# Altium PCB Summits7Beta_PCB1.PcbDoc
Units mm, origin at the board's own origin, x right, y up, seen from the top; angles counter-clockwise.
Board outline 62.5 x 25 mm, 2 copper layers (Top Layer, Bottom Layer); 52 components, 37 nets, 173 pads, 50 vias.
Unrouted connection lines stored in the file: 108.
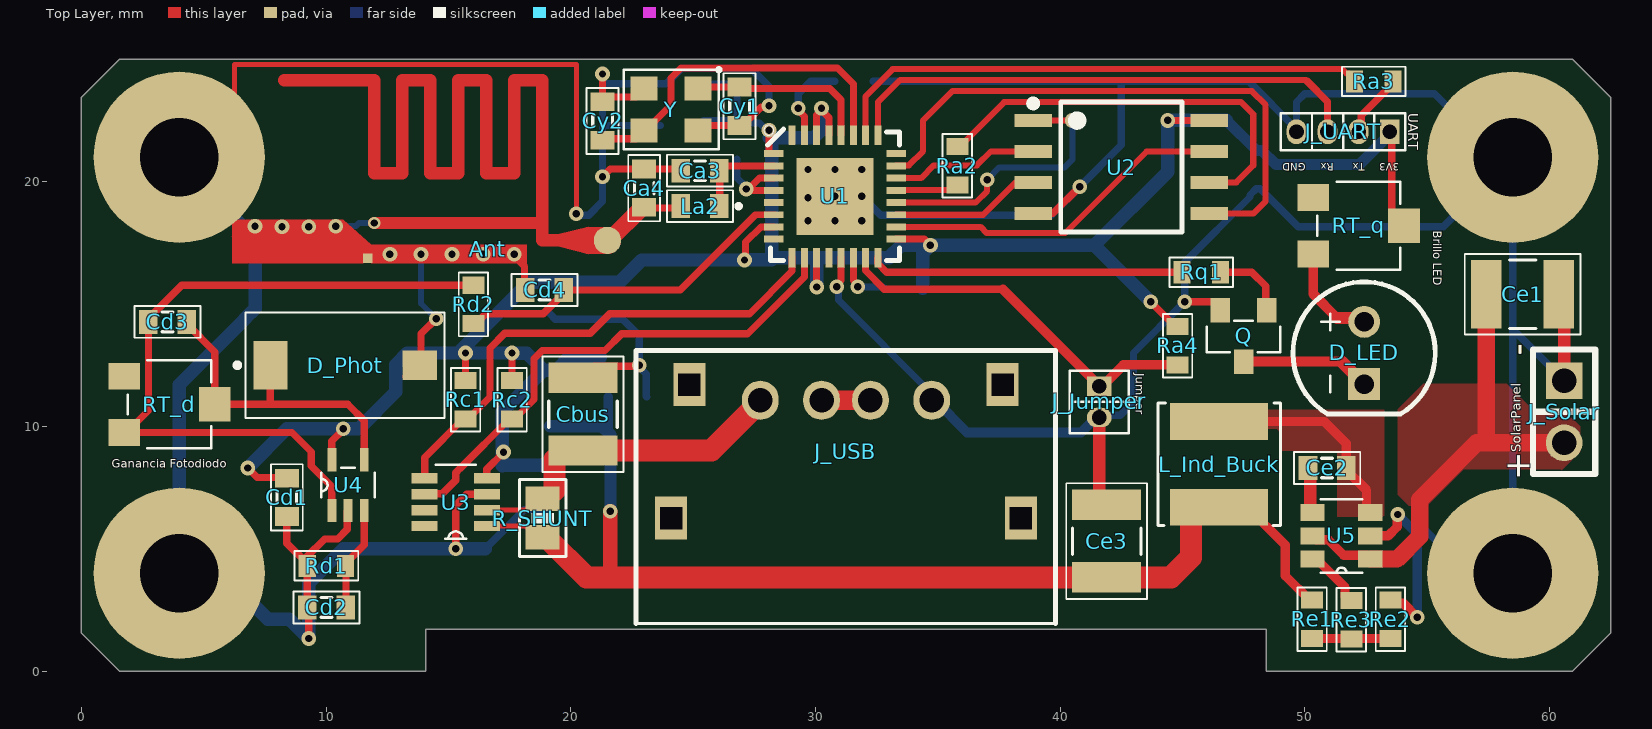
[diagram p0: Top Layer view]
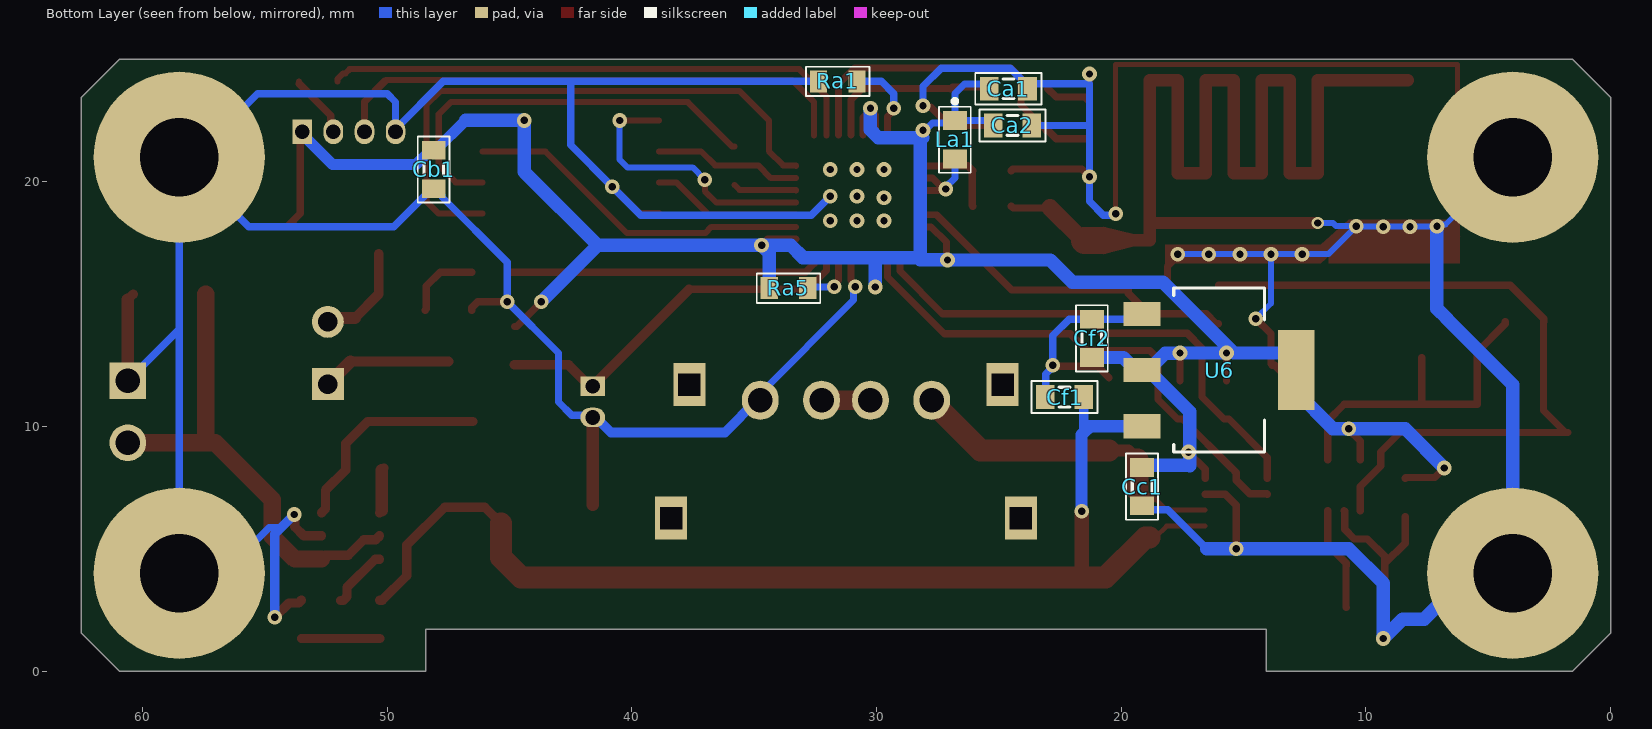
[diagram p1: Bottom Layer view, seen from below]

## Layer stack, top to bottom
Top Solder: solder mask 0.0102, Solder Resist, Dk 3.5
Top Layer: signal copper 0.0356
Dielectric 1: dielectric 0.32, FR-4, Dk 4.8
Bottom Layer: signal copper 0.0356
Bottom Solder: solder mask 0.0102, Solder Resist, Dk 3.5

## Board outline
62.5,1.55 60.95,0 48.425,0 48.425,1.7 14.075,1.7 14.075,0 1.55,0 0,1.55 0,23.45 1.55,25 60.95,25 62.5,23.45

## Design rules (kind name [scope] priority, off if disabled: settings)
Clearance [All] p1: gap=0.2 ignorepadtopadclearanceinfootprint=FALSE
ComponentClearance [All] p1: gap=0.099 collisioncheckmode=3 verticalgap=0.099 showdistances=FALSE
HoleSize [All] p1: absolutevalues=TRUE maxlimit=3.2 minlimit=0.025 maxpercent=80.000 minpercent=20.000
MinimumSolderMaskSliver [All] p1: minsoldermaskwidth=0.045
PlaneConnect [All] p1: planeconnectstyle=Direct reliefexpansion=0.508 reliefentries=4 reliefconductorwidth=0.254 reliefairgap=0.254
PolygonConnect [All] p1: connectstyle=Direct reliefconductorwidth=0.254 reliefentries=4 polygonreliefangle="90 Angle" airgapwidth=0.254
RoutingVias [All] p1: holewidth=0.3 width=0.6 viastyle="Through Hole" minholewidth=0.008 minwidth=0.5 maxholewidth=4 maxwidth=7.1
SilkToSilkClearance [All] p1: silktosilkclearance=0
SilkToSolderMaskClearance [IsPad] p1: minsilkscreentomaskgap=0.099 clearancetoexposedcopper=TRUE
SolderMaskExpansion [All] p1: expansion=0.102
Width [All] p1: maxlimit=1.2 minlimit=0.2 preferedwidth=0.2
24 further rules are at their usual default settings.

## Components (designator, comment, footprint, x,y, rotation, side; value= is the part's Value field where it differs from the comment)
Ant "Antena" ANTENA2 18.198,4.468 r0 top
Ca1 "10uF" CAP_0603 24.615,23.8 r180 bottom
Ca2 "100nF" CAP_0603 24.45,22.3 r180 bottom
Ca3 "3.0pF" CAP_0603 25.285,20.45 r180 top
Ca4 "2.4pF" CAP_0603 23,19.735 r90 top
Cb1 "4.7uF" CAP_0603 48.1,20.5 r270 bottom
Cbus "22uF" CAP_1210 20.5,10.5 r90 top
Cc1 "4.7uF" CAP_0603 19.15,7.535 r270 bottom
Cd1 "4.7uF" CAP_0603 8.4,7.1 r270 top
Cd2 "100pF" CAP_0603 10.015,2.6 r180 top
Cd3 "100pF" CAP_0603 3.515,14.27 r180 top
Cd4 "2.2uF" CAP_0603 18.93,15.575 r180 top
Ce1 "22uF" CAP_1210 58.9,15.4 r0 top
Ce2 "1uF" CAP_0603 50.915,8.3 r0 top
Ce3 "22uF" CAP_1210 41.9,5.315 r90 top
Cf1 "22uF" CAP_0603 22.315,11.2 r0 bottom
Cf2 "22uF" CAP_0603 21.2,13.6 r90 bottom
Cy1 "100nF" CAP_0603 26.9,23.085 r270 top
Cy2 "100nF" CAP_0603 21.3,22.485 r90 top
D_LED "OVLGC0C6B9" LED 52.425,13 r90 top locked
D_Phot "VBPW34S" BPW34S 10.775,12.5 r180 top locked
J_Jumper "Jumper" "JUMPER-1.27 mm" 41.6,11 r270 top
J_Solar "Connx2_Panel" PANEL_IN 60.6,10.6 r90 top
J_UART "Connx4_UART" UART-1.27MM 51.565,22.043 r180 top
J_USB "USB-A 5V" USB-A_IPX8 27.75,11.07 r0 top
L_Ind_Buck "6.8uH 2.3A" Inductor_SRN5040 46.5,8.45 r90 top
La1 "2.2nH" IND_0603 26.825,21.69 r270 bottom
La2 "2.2nH" IND_0603 25.26,19.025 r180 top
Q "ZXT11N20DF" Transistor_SOT23-3 47.5,13.7 r180 top
R_SHUNT "0.01 Ohm 0.5W 1%" RES-SHUNT-0805 18.85,6.25 r90 top
Ra1 "12k +- 1%" RES_0603 31.585,24.1 r0 bottom
Ra2 "220" RES_0603 35.8,20.65 r270 top
Ra3 "500" RES_0603 52.815,24.1 r180 top
Ra4 "1k" RES_0603 44.8,13.3 r270 top
Ra5 "5k" RES_0603 33.6,15.65 r180 bottom
Rc1 "10k" RES_0603 15.7,11.085 r270 top
Rc2 "10k" RES_0603 17.6,11.085 r270 top
Rd1 "1k" RES_0603 10.015,4.3 r0 top
Rd2 "6.8k" RES_0603 16.025,14.985 r90 top
Re1 "40.2k" RES_0603 50.3,2.115 r270 top
Re2 "7.68k" RES_0603 53.5,2.115 r90 top
Re3 "59k" RES_0603 51.9,2.1 r270 top
Rq1 "1k" RES_0603 45.765,16.3 r180 top
RT_d "R_Trimmer_20k" RES_TRIMMER 3.6,10.9 r270 top
RT_q "R_Trimmer_100" RES_TRIMMER 52.2,18.2 r270 top
U1 "ESP8266EX" ESP8266_QFN32-5X5MM 30.8,19.4 r0 top
U2 "W25Q32JVSSIQ" W25Q32JVSSIQ_SOIC127P790X216-8N 42.5,20.6 r0 top
U3 "INA219BIDCNR" "INA219B SOT23" 15.3,6.9 r180 top
U4 "MCP6001T-E/LT" MCP6001-SC70-5 10.9,7.6 r90 top
U5 "AP65111AWU-7" AP65111A-SOT23-6 51.5,5.525 r180 top
U6 "LT1117IST-3.3" LT1117IST-3.3_SOT-223 16,12.3 r180 bottom
Y "ABM8-26MHz" ABM8-26_OSCSC320X250X100N 24.1,22.95 r270 top

## Footprints (in the part's own frame and the unit in brackets; to place one, negate y for a bottom-side part, rotate by r counter-clockwise, add the part's x,y. Pads: shape width x height; smd on the part's side, far side on the other; paste and mask are expansions set on the pad)
ABM8-26_OSCSC320X250X100N [mm] "Crystal de 26MHz"
  rect 0.98x1.1 smd: 1(-0.85,1.1) 2(-0.85,-1.1) 3(0.85,-1.1) 4(0.85,1.1)
  silkscreen extent -1.71,-1.93 1.63,2.04, body extent -1.25,-1.6 1.25,1.6, height 2.63
ANTENA2 [mil] "Footprint Antena2"
  round 44 smd: 1(130,517)
  rect 15x15 smd: 2(-255.91,488.19)
  Top Layer region: -262.8,480.32 -262.8,492.13 -295.67,525 -473.03,525 -474.41,523.62 -473.43,522.64 -473.43,480.32
  Top Layer region: -335,515
  Top Layer region: -250,510 -295,550 -325,550 -470,550 -470,525 -300,525 -250,480.32
  Top Layer region: 0,480.32 -250,480.32 -250,510 0,510 0,490
  Top Layer region: 49,505
  Top Layer region: 50,527.12 100,539.12 100,495 50,507.77
  Top Layer region: 48,500
  Top Layer region: 25,495
  Top Layer lines w7.87: -470,525 -470,650.86 -470,800 80,800 80,560
  Top Layer lines w20: -390,775 -245,775 -245,625 -200,625 -200,775 -155,775 -155,625 -110,625 -110,775 -65,775 -65,625 -20,625 -20,775 25,775 25,517 50,517 ; -245,545 25,545
  Top Layer lines w44: 100,517 130,517
AP65111A-SOT23-6 [mm] "Footprint Buck"
  rect 1x0.7 smd: 1(-1.185,0.95) 2(-1.185,0) 3(-1.185,-0.95) 4(1.185,-0.95) 5(1.185,0) 6(1.185,0.95)
  silkscreen extent -0.85,-1.5 0.85,1.5, body extent -1.4,-1.45 1.4,1.45, height 1.45
BPW34S [mm] "Footprint Fotodiodo"
  rect 1.4x1.2 smd paste-2 mask+0: A(-3.05,0)
  rect 1.4x2 smd paste-2 mask+0: C(3.05,0)
  silkscreen extent -4.06,-2.16 4.5,2.16, body extent -3.2,-1.95 3.2,1.95, height 1.23
CAP_0603 [mm] "Footprint Cap Ceramic 0603"
  rect 0.762x0.976 smd: 1(-0.785,0) 2(0.785,0)
  silkscreen extent -1.35,-0.65 1.35,0.65, body extent -0.8,-0.4 0.8,0.4, height 0.81
CAP_1210 [mm] "Footprint Cap Ceramic 1210"
  rect 1.24x2.81 smd: 1(-1.485,0) 2(1.485,0)
  silkscreen extent -2.36,-1.65 2.36,1.65, body extent -1.6,-1.25 1.6,1.25, height 0.79
ESP8266_QFN32-5X5MM [mm] "Footprint del ESP8266EX"
  rect 0.8x0.285 smd mask+0.065: 1(-2.5,1.75) 2(-2.5,1.25) 3(-2.5,0.75) 4(-2.5,0.25) 5(-2.5,-0.25) 6(-2.5,-0.75) 7(-2.5,-1.25) 8(-2.5,-1.75) 17(2.5,-1.75) 18(2.5,-1.25) 19(2.5,-0.75) 20(2.5,-0.25) 21(2.5,0.25) 22(2.5,0.75) 23(2.5,1.25) 24(2.5,1.75)
  rect 0.285x0.8 smd mask+0.065: 9(-1.75,-2.5) 10(-1.25,-2.5) 11(-0.75,-2.5) 12(-0.25,-2.5) 13(0.25,-2.5) 14(0.75,-2.5) 15(1.25,-2.5) 16(1.75,-2.5) 25(1.75,2.5) 26(1.25,2.5) 27(0.75,2.5) 28(0.25,2.5) 29(-0.25,2.5) 30(-0.75,2.5) 31(-1.25,2.5) 32(-1.75,2.5)
  rect 3.15x3.15 smd paste-3: EP(0,0)
  silkscreen extent -2.9,-2.63 2.63,2.9, body extent -2.5,-2.5 2.5,2.5, height 1.55
"INA219B SOT23" [mm] "Current Monitor"
  rect 1.067x0.42 smd mask+0.09: 1(-1.27,0.975) 2(-1.275,0.325) 3(-1.27,-0.325) 4(-1.27,-0.975) 5(1.27,-0.975) 6(1.27,-0.325) 7(1.27,0.325) 8(1.27,0.975)
  silkscreen extent -0.81,-1.52 0.81,1.5, body extent -1.4,-1.47 1.4,1.47, height 1.2
IND_0603 [mm] "Footprint de Inductor 0603"
  rect 0.762x0.976 smd: 1(-0.81,0.025) 2(0.76,0.025)
  silkscreen extent -1.67,-0.63 1.33,0.67, body extent -0.8,-0.45 0.8,0.5, height 0.81
Inductor_SRN5040 [mm] "Inductor_SRN5040"
  rect 1.5x4 smd: 1(-1.75,0) 2(1.75,0)
  silkscreen extent -2.5,-2.5 2.5,2.5, body extent -2.5,-2.5 2.5,2.5, height 4.01
"JUMPER-1.27 mm" [mm] "Footprint Jumper"
  rect 0.8x1.016 hole 0.6: 1(-0.635,0)
  oval 0.8x1.016 hole 0.6: 2(0.635,0)
  silkscreen extent -1.27,-1.2 1.28,1.2, body extent -1.27,-1.2 1.27,1.2, height 4.85
LED [mm] "Led True Hole"
  rect 1.3x1.3 hole 0.8: 1(-1.27,0)
  round 1.3 hole 0.8: 2(1.27,0)
  silkscreen extent -2.5,-2.91 2.9,2.91, body extent -2.5,-2.95 2.95,2.95, height 15.98
LT1117IST-3.3_SOT-223 [mil] "Regulador 3.3V"
  rect 59x39 smd: 1(-124,90.5) 2(-124,0) 3(-124,-90.5)
  rect 59x129 smd: 4(124,0)
  silkscreen extent -73,-132 73,132, body extent -137,-128 137,128, height 67
MCP6001-SC70-5 [mil] "Footprint OPAMP"
  rect 37.4x14 smd: 1(-41,26) 2(-41,0) 3(-41,-26) 4(41,-26) 5(41,26)
  silkscreen extent -20,-43 28,43, body extent -45,-41 45,41, height 40
PANEL_IN [mm] "Footprint Entrada del Panel Solar"
  round 1.5 hole 1: 1(-1.27,0)
  rect 1.5x1.5 hole 1: 2(1.27,0)
  silkscreen extent -2.54,-1.27 2.54,1.27
RES-SHUNT-0805 [mm] "SHUNT 0805"
  rect 1x1.4 smd: 1(-0.785,0) 2(0.785,0)
  silkscreen extent -1.57,-0.95 1.58,0.95, body extent -0.99,-0.66 1.03,0.61, height 0.63
RES_0603 [mm] "Footprint Resistor 0603"
  rect 0.7x0.9 smd: 1(-0.785,0) 2(0.785,0)
  silkscreen extent -1.3,-0.6 1.3,0.6, body extent -0.8,-0.4 0.8,0.4, height 0.46
RES_TRIMMER [mm] "Trimmer"
  rect 1.1x1.3 smd: 1(-1.15,-1.85) 3(1.15,-1.85)
  rect 1.4x1.3 smd: 2(0,1.85)
  silkscreen extent -1.8,-1.7 1.8,1.7, body extent -1.7,-1.8 1.7,1.8, height 2
Transistor_SOT23-3 [mm] "Transistor NPN"
  rect 0.8x1 smd: B(-0.95,-1.05) C(0,1.05) E(0.95,-1.05)
  silkscreen extent -1.5,-0.63 1.5,0.67, body extent -1.5,-1.25 1.5,1.25, height 1.11
UART-1.27MM [mm] "Socket UART"
  rect 0.8x1.016 hole 0.6: 1(-1.905,0)
  oval 0.8x1.016 hole 0.6: 2(-0.635,0) 3(0.635,0) 4(1.905,0)
  silkscreen extent -2.54,-0.76 2.54,0.76, body extent -2.54,-1.2 2.54,1.2, height 4.85
USB-A_IPX8 [mm] "Footprint del USB tipo A"
  oval 1.5x1.6 hole 1: 1(0,0) 2(2.5,0) 3(4.5,0) 4(7,0)
  rect 1.3x1.75 hole 0.9 square: 5(-3.65,-4.82) 5(-2.9,0.64) 5(9.9,0.64) 5(10.65,-4.82)
  silkscreen extent -5.08,-9.13 12.06,2.03
W25Q32JVSSIQ_SOIC127P790X216-8N [mil] "Memoria Flash SOIC8 SS"
  rect 60x21 smd: 1(-141.73,75) 2(-141.73,25) 3(-141.73,-25) 4(-141.73,-75) 5(141.73,-75) 6(141.73,-25) 7(141.73,25) 8(141.73,75)
  silkscreen extent -151,-104 97,111, body extent -161,-106 161,106, height 85

## Part data
Ca1 Ca2 Ca3 Ca4 Cb1 Cc1 Cd1 Cd2 Cd3 Cd4 Ce2 Cf1 Cf2 Cy1 Cy2: library part Cap_0603_Ceramic, "Capac Ceramic SMD"
Cbus Ce1 Ce3: library part Cap_1210_Ceramic, "Capac Ceramic SMD"
D_LED: "LED Green-Blue 505nm", Package="0603 Broadcom", Supplier Part Number 1=828-OVLGC0C6B9, Availability=Unavailable, MF="Broadcom Limited", MP=HSMW-C191, Price=None, SnapEDA_Link=https://www.snapeda.com/parts/HSMW-C191/Broadcom%20Limited/view-part/1840124/?ref=snap, Supplier 1=Mouser
D_Phot: "Photodiode 850nm 25ns 120° 2-SMD, Gull Wing", Package="SMD-2 Osram Opto", Supplier Part Number 1=782-VBPW34SR, Availability=Unavailable, MF="OSRAM Opto", MP="BPW 34 BS-Z", Price=None, SnapEDA_Link=https://www.snapeda.com/parts/BPW%2034%20BS-Z/OSRAM%20Opto%20Semiconductors%20Inc./view-part/392328/?ref=snap, Supplier 1=Mouser
J_Jumper: "2.54mm Pin Header 2x1", Supplier Part Number 1=855-M20-9990245, Supplier 1=Mouser
J_Solar: "Conector del Panel"
J_UART: "1.27mm Pin Header 4x1", Supplier Part Number 1=855-M50-3530442, Supplier 1=Mouser
J_USB: "Conector del USB"
L_Ind_Buck: library part Ind_SRN5040, "Inductor_SRN5040", Package="Nonstandard Vishay Dale", Supplier Part Number 1=652-SRN5040-6R8M, Availability=Unavailable, MF="Vishay Dale", Price=None, SnapEDA_Link=https://www.snapeda.com/parts/IHLP-2525CZ-01/Vishay%20Dale/view-part/561997/?ref=snap, Supplier 1=Mouser
La1 La2: library part Ind_0603, "Inductor SMD 0603", Package="0603 Murata", Availability=Unavailable, MF=Murata, MP=LQP03TN62NHZ2D, Price=None, SnapEDA_Link=https://www.snapeda.com/parts/LQP03TN62NHZ2D/Murata/view-part/4472751/?ref=snap
Q: "Transistor NPN Low Saturation Vce", Supplier Part Number 1=522-ZXT11N20DFTA, Supplier 1=Mouser
R_SHUNT: library part Shunt_0805, "Shunt", Supplier Part Number 1=667-ERJ-6BWFR010V, LatestRevisionDate=17-Jul-2002, LatestRevisionNote="Re-released for DXP Platform.", PackageDescription="Axial Device, Thru-Hole; 2 Leads; 0.3 in Pin Spacing", PackageReference=AXIAL-0.3, Published=8-Jun-2000, Publisher="Altium Limited", Supplier 1=Mouser
Ra1 Ra2 Ra3 Ra4 Ra5 Rc1 Rc2 Rd1 Rd2 Re1 Re2 Re3 Rq1: library part Res_0603, "Resistor SMD", LatestRevisionDate=17-Jul-2002, LatestRevisionNote="Re-released for DXP Platform.", PackageDescription="Axial Device, Thru-Hole; 2 Leads; 0.3 in Pin Spacing", PackageReference=AXIAL-0.3, Published=8-Jun-2000, Publisher="Altium Limited"
RT_d: "Trimmer Resistor SMD 20kohm", Supplier Part Number 1=81-PVG3A203C01R00, LatestRevisionDate=17-Jul-2002, LatestRevisionNote="Re-released for DXP Platform.", PackageDescription="Axial Device, Thru-Hole; 2 Leads; 0.3 in Pin Spacing", PackageReference=AXIAL-0.3, Published=8-Jun-2000, Publisher="Altium Limited", Supplier 1=Mouser
RT_q: "Trimmer Resistor SMD 100ohm", Supplier Part Number 1=81-PVG3G101C01R00, LatestRevisionDate=17-Jul-2002, LatestRevisionNote="Re-released for DXP Platform.", PackageDescription="Axial Device, Thru-Hole; 2 Leads; 0.3 in Pin Spacing", PackageReference=AXIAL-0.3, Published=8-Jun-2000, Publisher="Altium Limited", Supplier 1=Mouser
U1: "Microcontrolador ESP8266", Package="VFQFN-32 Espressif Systems", Supplier Part Number 1=356-ESP8266EX, Availability=Unavailable, MF="Espressif Systems", MP=ESP8266, Price=None, SnapEDA_Link=https://www.snapeda.com/parts/ESP8266/Espressif%20Systems/view-part/106411/?ref=snap, Supplier 1=Mouser
U2: "FLASH - NOR Memory IC 32Mb _4M x 8_ SPI - Quad I/O 133MHz 8-SOIC", Package="SOIC-8 Winbond", Availability=Unavailable, MF=Winbond, MP=W25Q32JVSSIQ, Price=None, SnapEDA_Link=https://www.snapeda.com/parts/W25Q32JVSSIQ/Winbond%20Electronics/view-part/596953/?ref=snap
U3: "Current Monitor Regulator High-Side 10mA SOT-23-8", Package="SOT-23 Texas Instruments", Supplier Part Number 1=595-INA219BIDCNR, Digi-Key_Part_Number=296-46420-1-ND, Digi-Key_Purchase_URL=https://www.digikey.com.au/product-detail/en/texas-instruments/INA219BIDCNR/296-46420-1-ND/7033594?utm_source=snapeda&utm_medium=aggregator&utm_campaign=symbol, MF="Texas Instruments", MP=INA219BIDCNR, SnapEDA_Link=https://www.snapeda.com/parts/INA219BIDCNR/Texas%20Instruments/view-part/870494/?ref=snap, Supplier 1=Mouser
U4: "OP AMP - 1.8V 1MHz  Single Supply", Supplier Part Number 1=579-MCP6001T-E/LT, Supplier 1=Mouser
U5: "Buck Switching Regulator IC Positive Adjustable 0.8V 1 Output 1.5A SOT-23-6 Thin, TSOT-23-6", Package="TSOT-23-6 Diodes Inc.", Supplier Part Number 1=621-AP65111AWU-7, Availability=Unavailable, MF="Diodes Inc.", MP=AP65111AWU-7, Price=None, SnapEDA_Link=https://www.snapeda.com/parts/AP65111AWU-7/Diodes%20Inc./view-part/1631258/?ref=snap, Supplier 1=Mouser
U6: "LDO Regulator Pos 3.3V 0.8A Automotive 4-Pin_3+Tab_ SOT-223 Tube", Package="SOT-223-3 Analog Devices", Supplier Part Number 1=584-LT1117CST-3.3PBF, Availability=Unavailable, MF="Analog Devices", MP=LT1117IST-5#PBF, Price=None, SnapEDA_Link=https://www.snapeda.com/parts/LT1117IST-5%23PBF/Analog%20Devices/view-part/4348177/?ref=snap, Supplier 1=Mouser
Y: "26MHz ±10ppm Crystal 10pF 50 Ohms 4-SMD, No Lead", Package="SMD-4 Abracon", Supplier Part Number 1=815-ABM8-26-T, Digi-Key_Part_Number=300-8230-1-ND, Digi-Key_Purchase_URL=https://www.digikey.com/product-detail/en/abracon-llc/ABM8-26.000MHZ-10-1-U-T/300-8230-1-ND/687923?utm_source=snapeda&utm_medium=aggregator&utm_campaign=symbol, MF=Abracon, MP=ABM8-26.000MHZ-10-1-U-T, SnapEDA_Link=https://www.snapeda.com/parts/ABM8-26.000MHZ-10-1-U-T/Abracon%20LLC/view-part/356267/?ref=snap, Supplier 1=Mouser

## Free pads (board coordinates)
  round 7 hole 3.2: H(4,4) H(4,21) H(58.5,4) H(58.5,21)

## Via types
v1: diameter 0.6, hole 0.3, Top Layer to Bottom Layer, tented both sides, 49 vias
v2: diameter 0.508, hole 0.3, Top Layer to Bottom Layer, tented both sides, 1 vias

## Nets (pads, with @x,y where several pads share a name; then routed paths per layer and width w, separated by ;. In a path a pad name is that pad's centre, name@x,y a point inside that pad or via, vN(x,y) a via of type N, cw(c..) or ccw(c..) an arc to the next point about the centre after c; other vN are vias at no path point)
3.3uC: La1.2 U1.3 U1.4 | length 3.8
  Top Layer w0.285: U1.4 27.225,19.65 v1(27.175,19.7) 27.26,19.7 27.71,20.15 U1.3
  Bottom Layer w0.285: La1.2 26.8,20.16 27.175,19.785 v1(27.175,19.7)
3.3V: Ca1.1 Ca2.1 Cb1.1 Cc1.1 Cd1.1 Cf2.1 J_UART.1 La1.1 Ra4.1 Ra5.1 Rc1.1 Rc2.1 RT_q.2 U1.1 U1.7 U1.11 U1.17 U1.29 U1.30 U2.8 U3.4 U4.5 U6.2 U6.4 | length 110.6
  Top Layer w0.285: v1(27.1,16.8) 27.151,16.851 27.151,17.527 27.773,18.15 U1.7 ; v1(28.1,22.1) 28.1,21.15 U1.1 ; v1@30.05,15.906 U1.11 ; U1.30 30.05,22.719 30.058,22.727 ; v1(30.25,23) 30.25,22.919 30.25,22.915 30.542,22.622 30.55,22.615 U1.29 ; U1.17 34.45,17.65 v1(34.7,17.4) ; v1(44.4,22.505) U2.8
  Top Layer w0.3: v1(6.8,8.3) 7.19,7.91 8.375,7.91 Cd1.1 ; U4.5 10.24,9.4 10.705,9.865 v1(10.705,9.9) ; Rc1.1 v1(15.7,13) ; U3.4 16.57,8.253 17.25,8.933 v1(17.25,8.95) ; Rc2.1 v1(17.6,13) ; v1@29.956,15.7 v1(30.058,15.7) ; v1@30.25,22.919 30.542,22.627 30.542,22.622 ; v1(43.7,15.1) 43.7,15.085 44.7,14.085 Ra4.1 ; J_UART.1 53.55,21.963 53.55,18.7 RT_q.2
  Bottom Layer w0.285: Ca2.1 25.435,22.5 La1.1 ; 25.8,24 26.4,24 26.8,23.6 La1.1 ; v1(28.1,22.1) 28.015,22.1 27.716,22.399 26.901,22.399 La1.1 ; Cb1.1@48.018,21.285 Cb1.1
  Bottom Layer w0.45: 46.798,22.505 Cb1.1@48.018,21.285 ; Cb1.1 48.232,21.285 48.817,20.7 52.235,20.7 53.47,21.935 J_UART.1
  Bottom Layer w0.55: v1(6.8,8.3) 8.4,9.9 v1(10.705,9.9) 10.715,9.91 11.349,9.91 12.85,11.411 U6.4 12.85,12.526 13.325,13 15.4,13 18.3,15.9 22,15.9 22.9,16.8 v1(27.1,16.8) 27.11,16.81 28.21,16.81 ; v1(15.7,13) v1(17.6,13) 17.61,12.99 18.205,12.99 U6.2@18.896,12.3 ; Cc1.1 19.064,8.405 17.205,8.405 17.2,8.4 17.2,10.604 U6.2@18.896,12.3 ; U6.2 U6.2@18.896,12.3 ; U6.2@19.404,12.3 19.919,12.815 Cf2.1 ; v1(30.058,15.7) 30.058,16.9 ; v1(30.25,23) 30.25,22.122 29.928,21.8 28.11,21.8 28.21,21.7 28.21,16.81 ; Ra5.1 34.385,17.071 34.7,17.386 v1(34.7,17.4) ; v1(43.7,15.1) 41.4,17.4 ; 46.798,22.505 v1(44.4,22.505) 44.4,20.4 41.4,17.4 ; 28.21,16.81 28.3,16.9 30.058,16.9 ; 30.058,16.9 33.009,16.9 33.509,17.4 v1(34.7,17.4) ; v1(34.7,17.4) 41.4,17.4
5V: Ce3.1 Cf1.1 L_Ind_Buck.1 R_SHUNT.1 Re1.1 U3.1 U6.3 | length 48.8
  Top Layer w0.2: U3.1 18.145,5.925 18.605,5.465 R_SHUNT.1
  Top Layer w0.381: L_Ind_Buck.1@45.35,6.04 46.01,6.7 L_Ind_Buck.1 47.65,6.7 49.2,5.15 49.2,3.9 50.2,2.9 Re1.1
  Top Layer w0.6: 21.62,3.83 v1(21.62,6.531)
  Top Layer w0.9: R_SHUNT.1 19.005,5.465 20.64,3.83 21.62,3.83 Ce3.1 44.53,3.83 45.35,4.65 L_Ind_Buck.1@45.35,6.04
  Bottom Layer w0.381: 21.53,9.75 Cf1.1
  Bottom Layer w0.5: U6.3 21.278,10.001 21.53,9.75 21.62,9.66 v1(21.62,6.531)
A-Colector: D_LED.1 Q.C | length 5.3
  Top Layer w0.4: Q.C 51.505,12.65
  Top Layer w0.5: 51.505,12.65 D_LED.1
ADCin: Cd4.1 Rd2.1 U1.6 | length 14.2
  Top Layer w0.285: 27.1,18.2 27.55,18.65 U1.6
  Top Layer w0.3: Rd2.1 16.125,14.2 16.525,14.6 18.872,14.6 19.715,15.443 Cd4.1 24.475,15.575 27.1,18.2
AO_out: Cd3.2 Rd2.2 RT_d.3 U4.1 | length 29.6
  Top Layer w0.285: RT_d.3 RT_d.3@1.85,9.75 ; Cd3.2 2.743,14.257 2.743,10.643 RT_d.3@1.85,9.75 ; 9.4,8.95 8.6,9.75 RT_d.3@1.85,9.75
  Top Layer w0.3: Cd3.2 2.73,14.402 4.098,15.77 Rd2.2 ; 9.4,8.95 9.4,8.383 10.24,7.544 U4.1
Base: Q.B Rq1.1 | length 3.1
  Top Layer w0.3: Rq1.1 47.835,16.3 48.4,15.735 48.4,14.8 Q.B
BST1: Ce2.1 U5.4 | length 1.9
  Top Layer w0.381: Ce2.1 Ce2.1@50.223,8.208 ; U5.4@50.223,6.568 U5.4
  Top Layer w0.5: U5.4@50.223,6.568 Ce2.1@50.223,8.208
BST2: Ce2.2 L_Ind_Buck.2 U5.3 | length 8.8
  Top Layer w0.381: L_Ind_Buck.2 50.8,10.2 51.7,9.3 Ce2.2 51.7,8.218 52.522,7.397 52.522,6.635 52.681,6.475 U5.3
CLK_MEM: Ra2.1 U2.6 | length 17.2
  Top Layer w0.25: Ra2.1 35.9,21.435 37.715,23.25 47.4,23.25 47.895,22.755 47.895,20.667 47.2,19.972 46.107,19.972 U2.6
CS_MEM: U1.20 U2.1 | length 11.7
  Top Layer w0.25: U1.20 36.55,19.15 37.019,19.619 v1(37.019,20.086) ; U2.1@39.167,22.505 U2.1 38.902,22.503 40.498,22.503 v1(40.5,22.5)
  Bottom Layer w0.25: v1(37.019,20.086) 37.517,20.583 40.183,20.583 40.5,20.9 v1(40.5,22.5)
DI_MEM: U1.23 U2.5 | length 23.8
  Top Layer w0.25: U1.23 33.317,20.667 33.819,20.667 34.4,21.248 34.4,22.505 35.595,23.7 47.84,23.7 48.4,23.14 48.4,19.2 47.895,18.695 U2.5
DivisorFB: Re1.2 Re2.1 Re3.2 | length 3.2
  Top Layer w0.381: Re1.2 Re2.1
DO_MEM: U1.22 U2.2 | length 6
  Top Layer w0.25: U1.22 34.318,20.15 34.835,20.667 36.602,20.667 37.169,21.235 U2.2
FB: Re3.1 U5.6 | length 2.5
  Top Layer w0.381: U5.6 50.49,4.575 51.64,3.425 51.64,3.044 51.8,2.885 Re3.1
GND: Ant.1 Ant.2 Ca1.2 Ca2.2 Ca3.2 Ca4.1 Ca4.2 Cb1.2 Cbus.2 Cc1.2 Cd1.2 Cd2.2 Cd4.2 Ce1.2 Ce3.2 Cf1.2 Cf2.2 Cy1.2 Cy2.2 D_Phot.A J_Jumper.2 J_Solar.2 J_UART.4 J_USB.4 La2.2 pad.H Q.E Ra1.2 Rd1.1 Re2.2 U1.13 U1.EP U2.4 U3.3 U4.2 U5.2 U6.1 Y.2 Y.4 | length 238.5
  Top Layer w0.285: v1(17.69,17.041) 17.69,16.956 18.12,16.526 18.12,15.6 Cd4.2 ; v1(30.877,15.701) 30.877,15.786 31.05,15.959 U1.13
  Top Layer w0.3: Cd1.2 8.4,5.23 Rd1.1@9.23,4.4 ; v1(9.298,1.33) 9.298,2.532 Cd2.2 Rd1.1 Rd1.1@9.23,4.4 ; U4.2 10.872,6.531 10.872,5.794 10.478,5.4 9.943,5.4 9.23,4.687 Rd1.1@9.23,4.4 ; D_Phot.A@13.275,12.05 13.725,12.5 D_Phot.A 13.88,12.555 13.88,13.782 v1(14.5,14.402) ; v1(15.3,5) 15.3,6.775 15.75,7.225 U3.3 ; Cbus.2 20.97,12.455 22.755,12.455 v1(22.8,12.5) ; v1(21.3,20.2) 21.62,20.52 Ca4.2 24.43,20.52 Ca3.2 ; v1(21.3,24.4) Cy2.2 21.49,23.46 22.66,23.46 Y.2 ; Ant.1 Ant.1@21.568,17.6 ; Ca4.1@22.918,18.95 Ca4.1 23.025,18.925 24.425,18.925 La2.2 ; Y.4 25.4,22.3 Cy1.2 27.032,22.3 27.775,23.043 28.043,23.043 v1(28.1,23.1) ; U2.4 38.905,18.7 39.7,18.7 v1(40.8,19.8) ; v1(45.1,15.1) 46.3,15.1 46.55,14.85 Q.E
  Top Layer w0.381: U5.2 53.4,5.525 53.776,5.901 53.776,6.376 v1(53.8,6.4) ; Re2.2 53.616,2.784 54.016,2.784 v1(54.6,2.2) ; Ce1.2 Ce1.2@60.6,15.185
  Top Layer w0.5: Ce3.2@41.6,6.8 J_Jumper.2 ; J_Solar.2 Ce1.2@60.6,15.185
  Top Layer w0.7: Ant.1@21.568,17.6 Ca4.1@22.918,18.95
  Bottom Layer w0.25: pad.H@4,21 6.749,18.251 7.031,18.251 v1(7.098,18.184) 7.12,18.162 v1(8.198,18.162) v1(9.298,18.162) 9.309,18.173 10.387,18.173 v1(10.398,18.184) ; v2(11.975,18.311) 11.346,18.311 11.219,18.184 v1(10.398,18.184) ; v1(14.5,14.402) 13.88,15.022 v1(13.88,17.041) ; v1(17.69,17.041) v1(16.42,17.041) v1(15.15,17.041) v1(13.88,17.041) ; v1(10.398,18.184) 11.541,17.041 v1(12.61,17.041) v1(13.88,17.041)
  Bottom Layer w0.285: v1(30.877,15.701) 30.937,15.64 30.937,15.163 34.75,11.35 J_USB.4 J_USB.4@34.88,11.07
  Bottom Layer w0.3: 16.503,5 18.103,6.6 19,6.6 Cc1.2 ; U6.1 19.363,14.385 Cf2.2 22.129,14.385 22.8,13.714 v1(22.8,12.5) 22.8,12.419 23.081,12.138 23.081,11.219 Cf1.2 ; v1(20.23,18.692) 20.287,18.635 20.735,18.635 21.3,19.2 v1(21.3,20.2) 21.3,22.3 ; Ca2.2 21.3,22.3 ; v1(28.1,23.1) 28.1,23.9 27.362,24.638 24.536,24.638 23.898,24 21.3,24 21.3,22.3 ; v1(31.9,19.4) 32.665,18.635 39.635,18.635 v1(40.8,19.8) 42.5,21.5 42.5,24.1 ; Ra1.2 42.5,24.1 ; J_Jumper.2 41.696,10.461 42.461,10.461 43,11 43,13 v1(45.1,15.1) 45.1,16.715 47.762,19.377 47.762,19.459 48.018,19.715 Cb1.2 48.182,19.715 49.735,18.162 55.662,18.162 pad.H@58.5,21 ; J_Jumper.2@41.6,10.5 J_Jumper.2@41.658,10.558 ; J_UART.4 J_UART.4@49.66,22.151 ; 54.33,5.87 54.817,5.87 56.687,4 58.5,4 58.5,13.97 ; J_Solar.2 58.5,13.97 ; 42.5,24.1 47.711,24.1 J_UART.4@49.66,22.151 ; J_UART.4@49.66,22.151 49.66,23.26 50,23.6 55.3,23.6 57.9,21 pad.H@58.5,21 ; 58.5,13.97 pad.H@58.5,21
  Bottom Layer w0.381: v1(53.8,6.4) 54.33,5.87 54.6,5.6 v1(54.6,2.2)
  Bottom Layer w0.4: J_USB.4@34.88,11.07 36.2,9.75 40.85,9.75 41.465,10.365 J_Jumper.2
  Bottom Layer w0.55: v1(7.098,18.184) 7.098,14.812 6.7,14.414 6.7,14.4 4,11.7 4,4 5.745,4 7.62,2.125 8.503,2.125 v1(9.298,1.33) 9.298,3.598 10.7,5 v1(15.3,5) 16.503,5
  other v1: 29.7,18.4 30.8,18.4 31.9,18.4 29.7,19.35 30.8,19.4 29.7,20.5 30.8,20.5 31.9,20.5
GPIO2: Ra5.2 U1.14 | length 2.4
  Top Layer w0.25: v1(31.725,15.701) v1@31.725,15.795
  Top Layer w0.285: U1.14 31.55,15.97 v1@31.725,15.795
  Bottom Layer w0.285: v1(31.725,15.701) 32.764,15.701 Ra5.2
HOLD_MEM: U1.18 U2.7 | length 14.3
  Top Layer w0.25: U1.18 36.75,18.15 37,17.9 40.2,17.9 43.535,21.235 U2.7
IN+: Cd2.1 Rd1.2 U4.3 | length 4.3
  Top Layer w0.3: Cd2.1 10.813,2.613 10.813,4.287 Rd1.2 10.8,4.4 11.56,5.16 U4.3
JUMPER: J_Jumper.1 Ra4.2 U1.15 | length 15.6
  Top Layer w0.285: U1.15 32.05,16.363 32.813,15.6
  Top Layer w0.3: 32.813,15.6 37.662,15.6
  Top Layer w0.4: 37.662,15.6 J_Jumper.1@41.614,11.649 ; J_Jumper.1 41.708,11.635 42.588,12.515 Ra4.2
K-Colector: D_LED.2 RT_q.3 | length 4.2
  Top Layer w0.3: D_LED.2@52.27,14.425 D_LED.2
  Top Layer w0.4: RT_q.3 50.35,15.4 51.325,14.425
  Top Layer w0.5: 51.325,14.425 D_LED.2@52.27,14.425
LED: Rq1.2 U1.16 | length 12.8
  Top Layer w0.285: U1.16@32.55,16.658 32.908,16.3
  Top Layer w0.3: U1.16@32.55,16.658 U1.16 ; 32.908,16.3 Rq1.2
NetR220: Ra2.2 U1.21 | length 2.6
  Top Layer w0.25: U1.21 33.317,19.667 35.602,19.667 Ra2.2
NetR500: Ra3.2 U1.26 | length 22.3
  Top Layer w0.25: U1.26 32.05,23.49 33.16,24.6 51.53,24.6 51.705,24.425 51.805,24.425 52.03,24.2 Ra3.2
OTG: J_USB.2 J_USB.3 | length 2
  Top Layer w0.8: J_USB.2 J_USB.3
Photodiode/IN-: Cd3.1 D_Phot.C RT_d.2 U4.4 | length 13.7
  Top Layer w0.3: Cd3.1 4.3,14.188 5.45,13.038 RT_d.2 7.75,10.9 ; D_Phot.C@7.725,12.8 7.725,10.925 7.75,10.9 ; U4.4 11.56,10.235 10.9,10.896 10.9,10.9 7.75,10.9
R12k: Ra1.1 U1.31 | length 3.5
  Top Layer w0.285: v1(29.3,23) 29.3,22.915 29.55,22.665 U1.31
  Bottom Layer w0.3: v1(29.3,23) 29.3,23.6 29.8,24.1 Ra1.1
SCL: Rc1.2 U1.9 U3.5 | length 20.8
  Top Layer w0.285: 27.3,14.6 29.05,16.35 U1.9@29.05,16.9
  Top Layer w0.3: U3.5 14.03,8.73 15.6,10.3 Rc1.2 15.8,10.3 16.7,11.2 16.7,13.2 17.3,13.8 20.8,13.8 21.6,14.6 27.3,14.6
SDA: Rc2.2 U1.10 U3.6 | length 21.1
  Top Layer w0.285: 27.221,13.782 29.55,16.111 U1.10
  Top Layer w0.3: U3.6 14.055,7.25 14.75,7.25 15.3,7.8 15.3,8.109 15.476,8.285 15.485,8.285 17.5,10.3 Rc2.2 17.7,10.3 18.5,11.1 18.5,12.767 18.833,13.1 21.4,13.1 22.083,13.782 27.221,13.782
U0RXD: J_UART.3 U1.25 | length 21.7
  Top Layer w0.25: U1.25 32.55,23.25 33.45,24.15 50.05,24.15 50.1,24.1
  Top Layer w0.3: 50.1,24.1 50.93,23.27 J_UART.3
U0TXD: J_UART.2 Ra3.1 | length 2.6
  Top Layer w0.25: J_UART.2 J_UART.2@52.305,22.148 ; Ra3.1@53.6,24 Ra3.1
  Top Layer w0.3: J_UART.2@52.305,22.148 52.305,22.705 Ra3.1@53.6,24
UC/Inductor: Ca3.1 La2.1 U1.2 | length 3.8
  Top Layer w0.285: Ca3.1@26.27,20.65 U1.2
  Top Layer w0.3: La2.1 26.095,19.025 26.095,20.425 Ca3.1 Ca3.1@26.27,20.65
V_Bus: Cbus.1 J_USB.1 R_SHUNT.2 U3.2 | length 14
  Top Layer w0.2: U3.2 17.75,6.575 18.145,6.575 18.605,7.035 R_SHUNT.2
  Top Layer w0.5: R_SHUNT.2 19.005,7.035 R_SHUNT.2@19.345,7.375 ; Cbus.1@19.345,8.645 19.715,9.015 Cbus.1 ; J_USB.1@27.529,11.07 J_USB.1 J_USB.1@27.75,11.02
  Top Layer w0.9: R_SHUNT.2@19.345,7.375 Cbus.1@19.345,8.645 ; Cbus.1 25.745,9.015 J_USB.1@27.75,11.02
V_Solar: Ce1.1 J_Solar.1 U5.1 U5.5 | length 19.6
  Top Layer w0.381: U5.5 50.475,5.365 50.957,5.365 51.588,4.735 52.525,4.735 U5.1
  Top Layer w0.6: 57.415,9.33 57.415,9.345
  Top Layer w0.7: U5.1 53.775,4.575 54.7,5.5 54.7,7 57.03,9.33 57.415,9.33 J_Solar.1 ; 57.415,9.345 Ce1.1
WP_MEM: U1.19 U2.3 | length 6.1
  Top Layer w0.25: U1.19 36.861,18.65 38.176,19.965 U2.3
XTAL_IN: Cy1.1 U1.28 Y.1 | length 7.5
  Top Layer w0.285: Cy1.1@26.97,23.8 30.6,23.8 31.05,23.35 U1.28
  Top Layer w0.3: Y.1 25.27,23.87 Cy1.1 Cy1.1@26.97,23.8
XTAL_OUT: Cy2.1 U1.27 Y.3 | length 14.5
  Top Layer w0.285: Y.3@23.06,22.1 24.1,23.14 24.1,24.235 24.505,24.64 30.91,24.64 31.55,24 U1.27
  Top Layer w0.3: Cy2.1 21.36,21.76 22.66,21.76 Y.3 Y.3@23.06,22.1
pads on no net: J_USB.5 RT_d.1 RT_q.1 U1.5 U1.8 U1.12 U1.24 U1.32 U3.7 U3.8

## Polygon pours and split planes (outlines as drawn)
no net on Top Solder (none): 6.2,24.9
FB on Bottom Layer "GND_Plane" (solid, pour order 36): -0.5,55.55 1,57.05 5.472,57.05 5.51,57.088 5.51,51.05 17.448,51.05 17.448,48.968 18.75,48.968 18.75,51.325 19.455,51.325 19.48,51.3 19.48,57.088 19.821,57.088 19.859,57.05 60.15,57.05 61.5,55.7 61.5,34.049 60.001,32.55 48,32.55 48,36.55 13.13,36.55 13.13,32.55 1,32.55 -0.5,34.05
GND on Bottom Layer "GND_Plane" (none, pour order 12): 10.846,35.4
V_Solar on Top Layer "GND_Plane" (solid, pour order 34): 55,6.75 56.5,8.25 60.458,8.25 60.5,8.208 61.25,8.958 61.25,10.001 60.751,10.5 59.5,10.5 58.25,11.75 54.84,11.75 53.8,10.71 53.8,7.2 54.25,6.75
BST2 on Top Layer "GND_Plane" (solid, pour order 30): 47.85,10.675 53.25,10.675 53.25,6.25 53.185,6.315 51.325,6.315 51.325,9.015 51.31,9 49,9 49,9.75 48.85,9.9 47.835,9.9
no net on Top Layer "GND_Plane" (solid, pour order 28): 47.85,10.675
GND on Top Layer "GND_Plane" (solid, pour order 24): 62.4,23.4

## Silkscreen, mask and mechanical layers (free items; w line width, h text height)
Top Overlay:
  text "Brillo LED" at 55.25,18 h0.35 r270
  text "Ganancia Fotodiodo" at 1.25,8.3 h0.35

## Text inside footprints (layer, text, board x,y; h text height)
J_Solar: Top Overlay "-" at 59.203,12.886 h1.02 r90; Top Overlay "+" at 59.203,7.806 h1.02 r90; Top Overlay "SolarPanel" at 58.822,8.949 h0.38 r90
J_UART: Top Overlay "UART" at 54.232,22.805 h0.41 r270; Top Overlay "3V3" at 53.851,20.754 h0.3 r180; Top Overlay "Tx" at 52.454,20.754 h0.3 r180; Top Overlay "Rx" at 51.184,20.754 h0.3 r180; Top Overlay "GND" at 50.041,20.754 h0.3 r180